# Altium PCB AnanasSTM32.PcbDoc
Units mm, origin at the board's own origin, x right, y up, seen from the top; angles counter-clockwise.
Board outline 41.4 x 42 mm, 2 copper layers (Top Layer, Bottom Layer); 57 components, 52 nets, 207 pads, 38 vias.
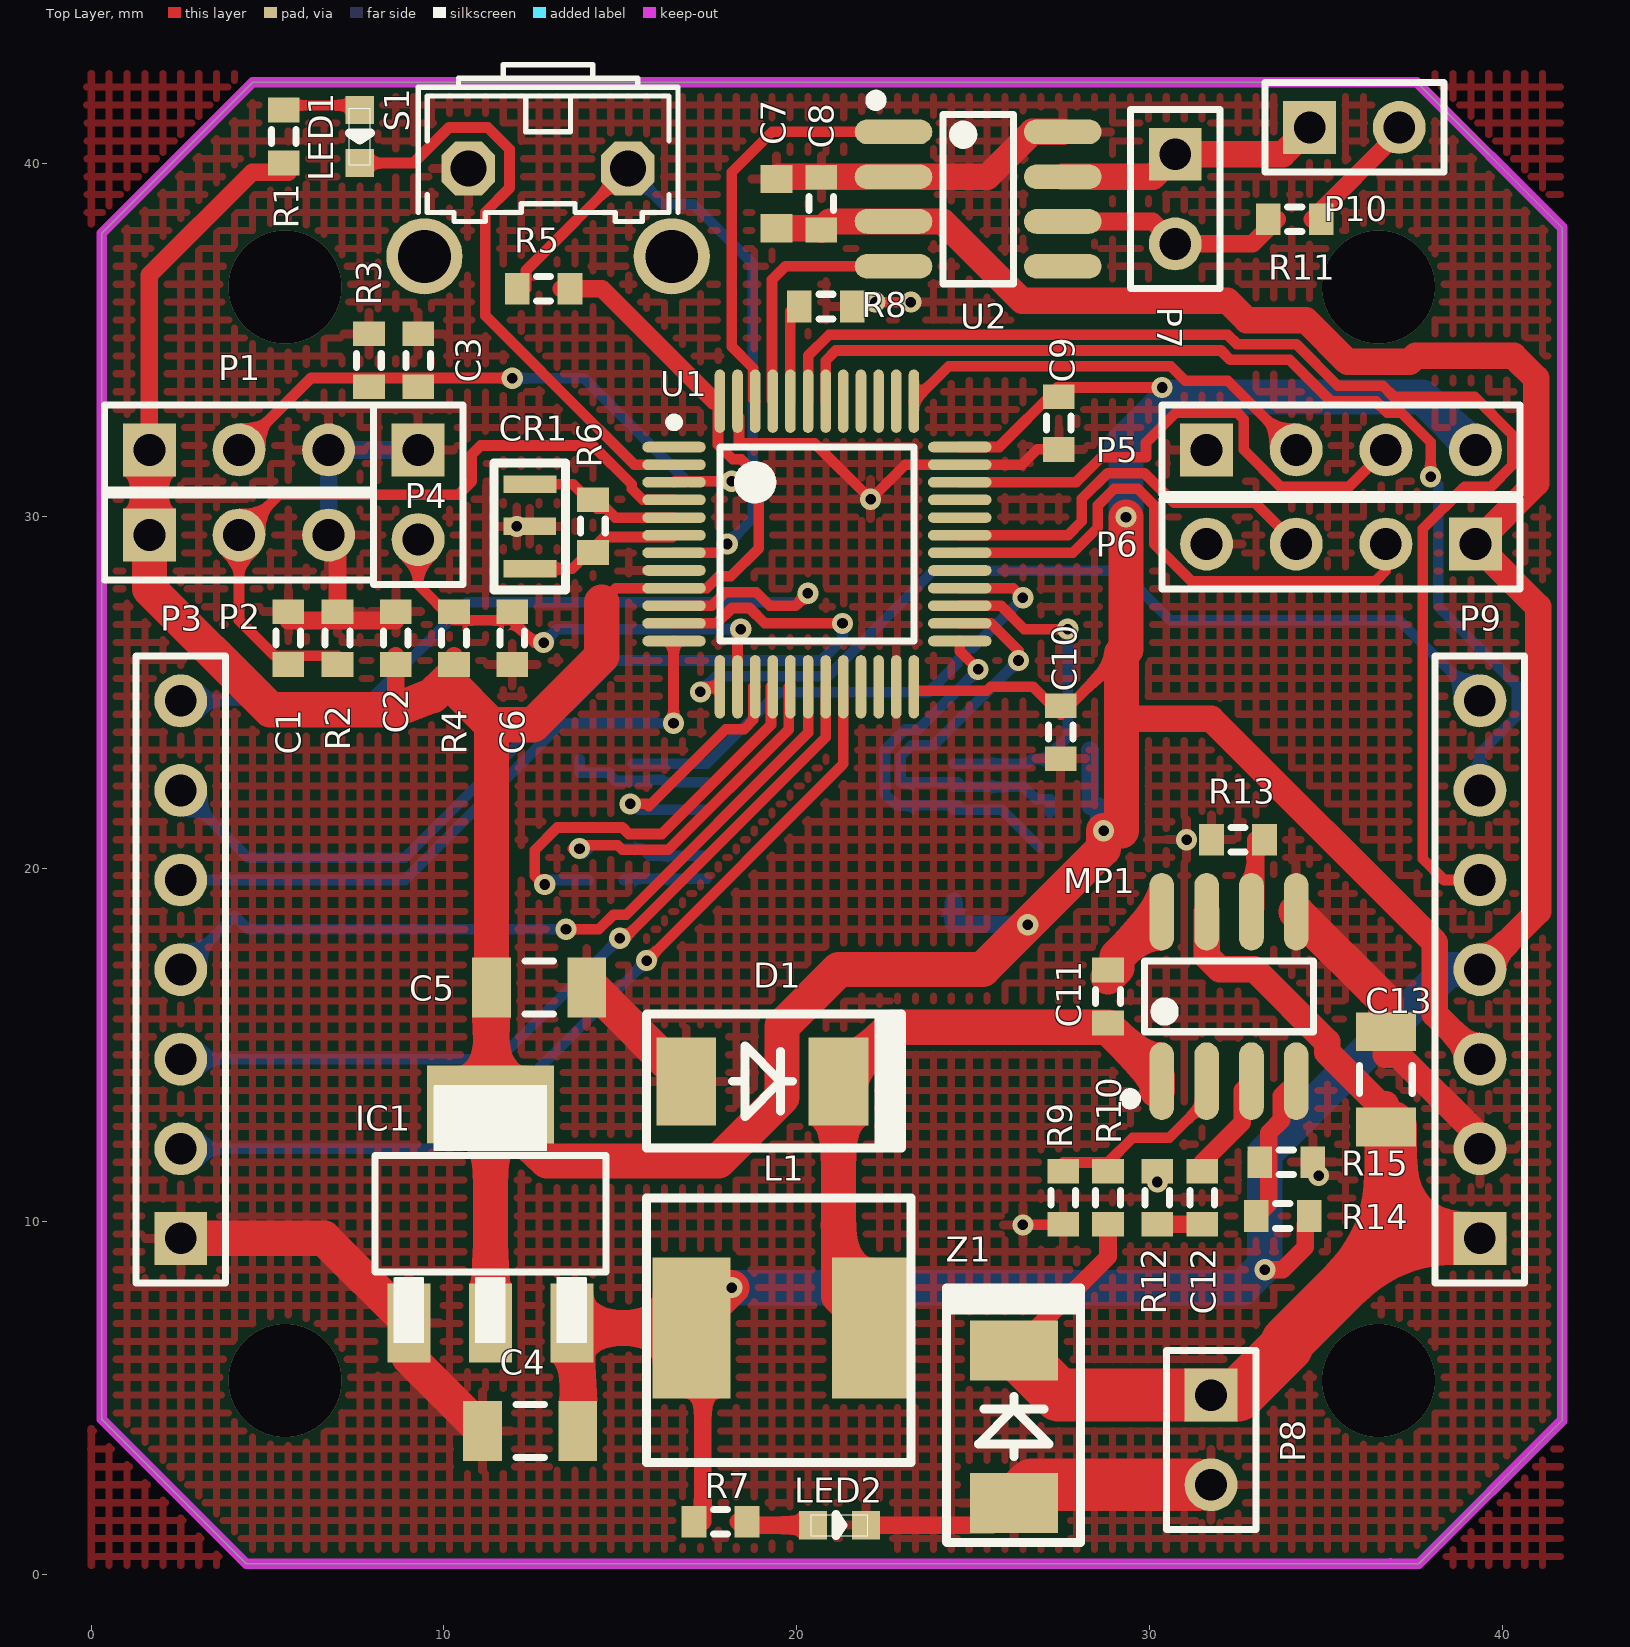
[diagram p0: Top Layer view]
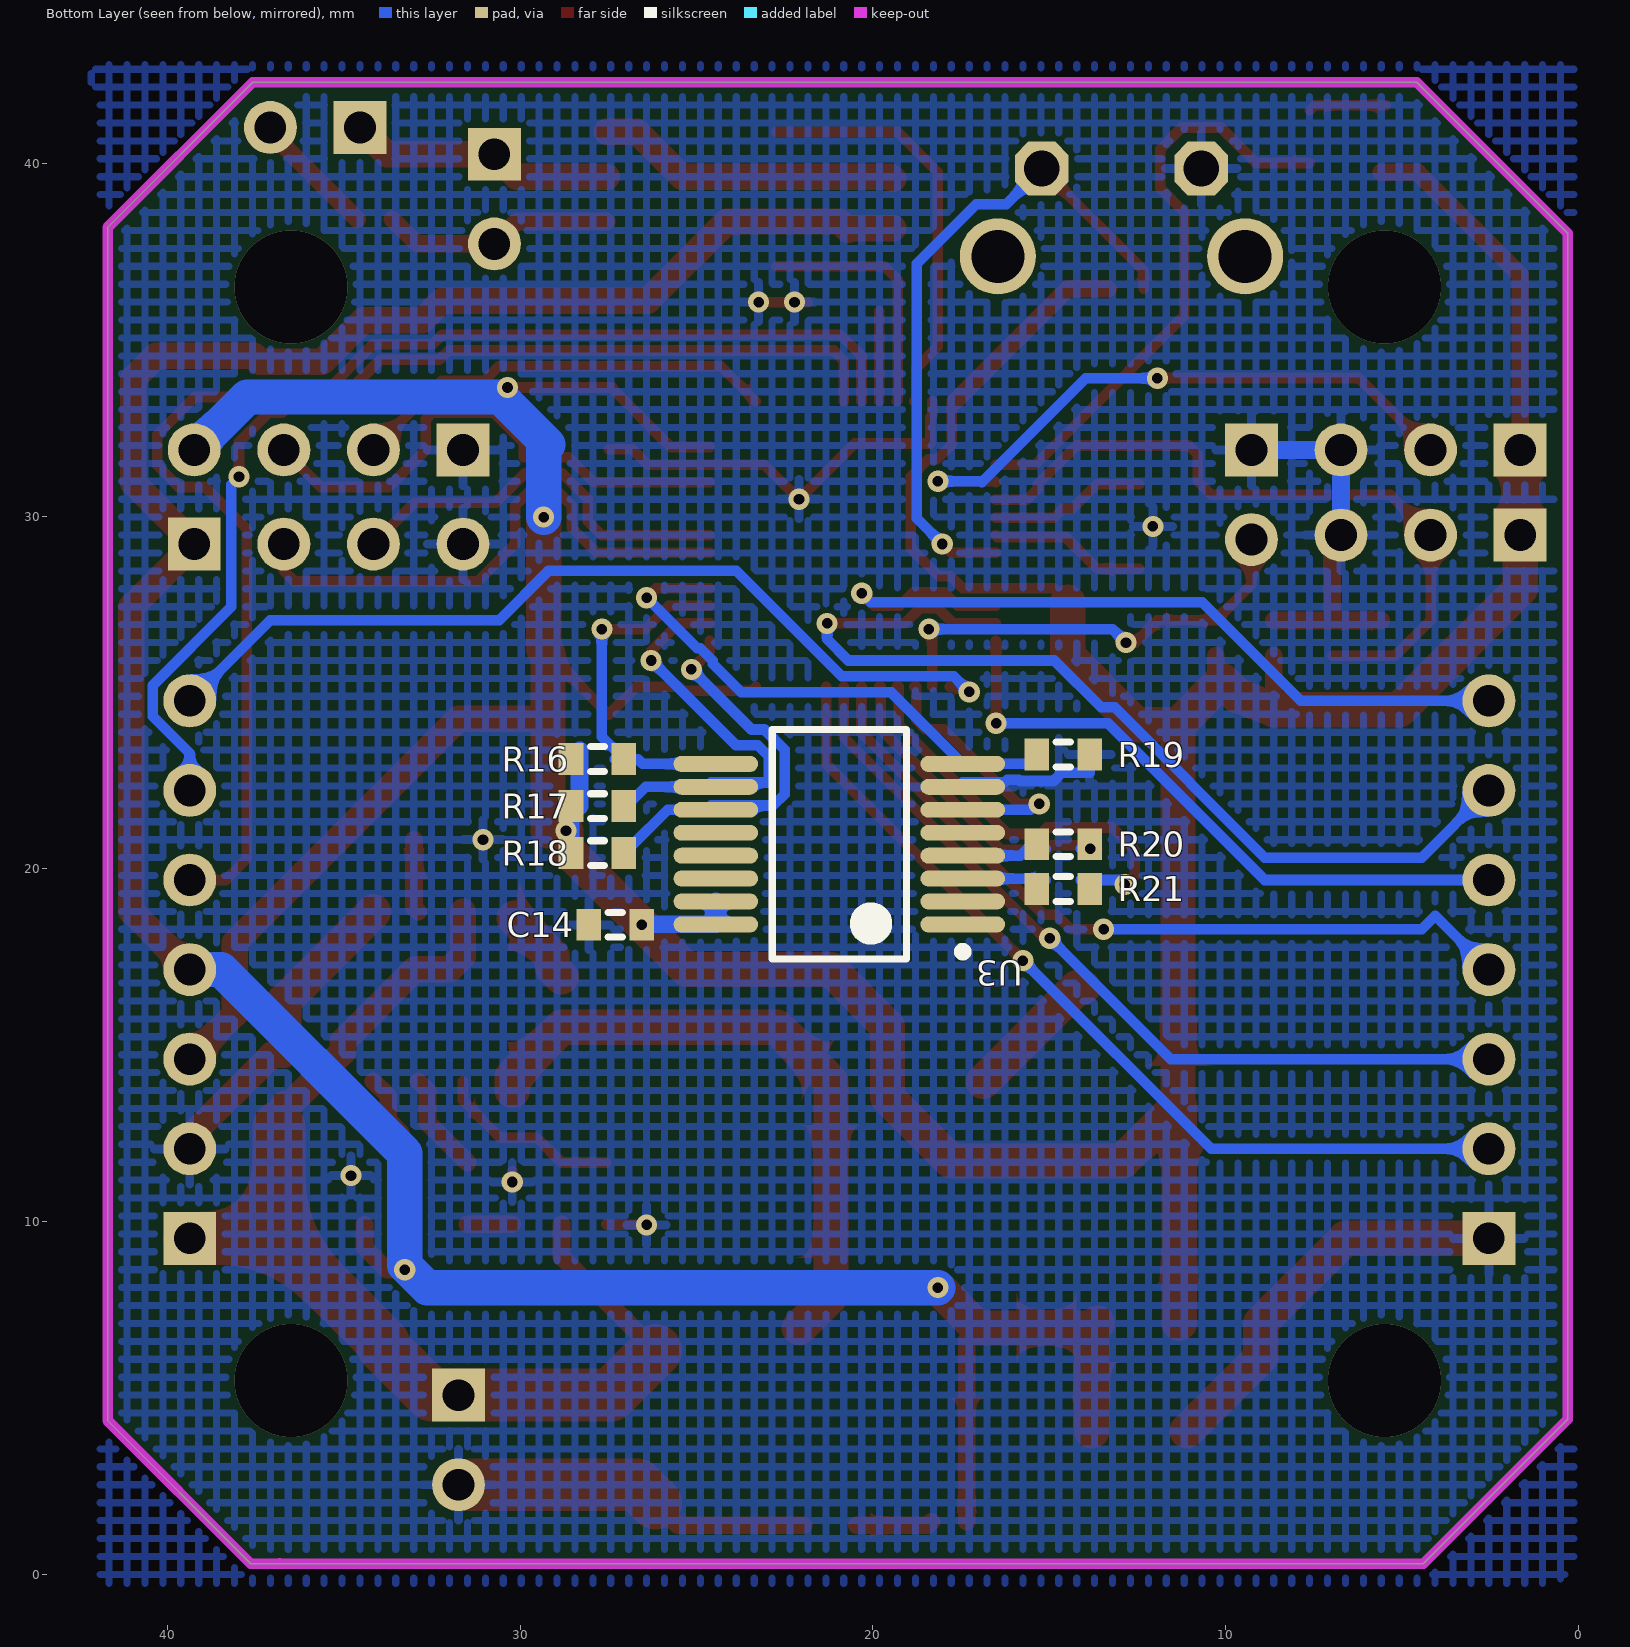
[diagram p1: Bottom Layer view, seen from below]

## Layer stack, top to bottom
Top Solder: solder mask 0.0102, Solder Resist, Dk 3.5
Top Layer: signal copper 0.0356
Dielectric 1: dielectric 0.32, FR-4, Dk 4.8
Bottom Layer: signal copper 0.0356
Bottom Solder: solder mask 0.0102, Solder Resist, Dk 3.5

## Board outline
4.399,0.3 0.3,4.399 0.3,38.019 4.581,42.3 37.583,42.3 41.7,38.183 41.7,4.362 37.638,0.3

## Design rules (kind name [scope] priority, off if disabled: settings)
Clearance [All] p1: gap=0.15
DiffPairsRouting [All] p1: maxlimit=0.254 minlimit=0.254 mostfreqgap=0.254 toplayer_minwidth=0.381 toplayer_maxwidth=1 toplayer_prefwidth=0.381 bottomlayer_minwidth=0.381 bottomlayer_maxwidth=1 bottomlayer_prefwidth=0.381 maxuncoupledlength=12.7
HoleSize [All] p1 off: absolutevalues=TRUE maxlimit=5 minlimit=0.025 maxpercent=80.000 minpercent=20.000
HoleToHoleClearance [All] p1 off: gap=0.254 allowstackedmicrovias=TRUE
MinimumSolderMaskSliver [All] p1: minsoldermaskwidth=0.1
PolygonConnect [All] p1: connectstyle=Relief reliefconductorwidth=0.254 reliefentries=4 polygonreliefangle="90 Angle" airgapwidth=0.254
RoutingVias [All] p1: holewidth=0.3 width=0.6 viastyle="Through Hole" minholewidth=0.3 minwidth=0.6 maxholewidth=0.711 maxwidth=1.27
SilkToBoardRegionClearance [All] p1 off:
SilkToSilkClearance [All] p1 off: silktosilkclearance=0
SilkToSolderMaskClearance [IsPad] p1 off: minsilkscreentomaskgap=0 clearancetoexposedcopper=TRUE
SolderMaskExpansion [All] p1 off: expansion=0.1
Width [All] p1: maxlimit=1.5 minlimit=0.2 preferedwidth=0.203 toplayer_minwidth=0.203 minimp=50.000000 maximp=50.000000 favimp=50.000000
23 further rules are at their usual default settings.

## Classes and differential pairs
differential pair CAN: +CAN_P -CAN_N

## Components (designator, comment, footprint, x,y, rotation, side; value= is the part's Value field where it differs from the comment)
C1 "100pF" J1-0603 5.588,26.543 r270 top (schematic designator C12)
C2 "100pF" J1-0603 8.636,26.543 r270 top (schematic designator C9)
C3 "100pF" J1-0603 9.271,34.417 r270 top (schematic designator C14)
C4 "22uF" C1206 12.446,4.064 r0 top (schematic designator C15)
C5 "22uf" C1206 12.7,16.637 r180 top (schematic designator C2)
C6 "10uF" J1-0603 11.938,26.543 r90 top (schematic designator C13)
C7 "10uF" 1608[0603] 19.431,38.862 r90 top (schematic designator C1)
C8 "100pF" J1-0603 20.701,38.862 r90 top (schematic designator C10)
C9 "4uF7" J1-0603 27.432,32.639 r90 top (schematic designator C7)
C10 "100pF" J1-0603 27.485,23.876 r90 top (schematic designator C8)
C11 "100pF" J1-0603 28.829,16.383 r270 top (schematic designator C4)
C12 "150pF" J1-0603 31.496,10.676 r90 top (schematic designator C6)
C13 "10uF" C1206 36.703,14.031 r270 top (schematic designator C3)
C14 "100pF" J1-0603 27.305,18.415 r180 bottom (schematic designator C11)
CR1 "8M" CSTCE8M 12.446,29.718 r270 top
D1 "SS22" SOD-6 16.878,13.97 r0 top (schematic designator D2)
IC1 "1117" SOT-223 9.017,7.112 r0 top
L1 "22uH" L74 19.431,6.985 r180 top
LED1 "LED-XH" LED-0603 7.62,40.005 r0 top (schematic designator LED2)
LED2 "LED-XH" LED-0603 21.971,1.397 r90 top (schematic designator LED1)
MP1 "MP1584" LC-SOIC-8_150mil 32.258,16.383 r0 top
P1 "STOP2" HDR1X3 1.651,31.877 r0 top (schematic designator P9)
P2 "STOP1" HDR1X3 1.651,29.464 r0 top (schematic designator P7)
P3 "EXTENSION1" HDR1X7 2.54,9.525 r90 top
P4 "TEMP" HDR1X2 9.271,31.877 r270 top (schematic designator P8)
P5 "Header 4" HDR1X4 31.623,31.877 r0 top (schematic designator P2)
P6 "UART" HDR1X4 39.243,29.21 r180 top (schematic designator P4)
P7 "CAN" HDR1X2 30.734,40.259 r270 top (schematic designator P5)
P8 "Header 2" HDR1X2 31.75,5.08 r270 top (schematic designator P1)
P9 "EXTENSION2" HDR1X7 39.37,9.525 r90 top (schematic designator P6)
P10 "CAN" HDR1X2 34.544,41.021 r0 top
R1 "4K7" J1-0603 5.461,40.763 r270 top (schematic designator R6)
R2 "10K" J1-0603 6.985,26.543 r270 top (schematic designator R21)
R3 "10K" J1-0603 7.874,34.417 r270 top (schematic designator R22)
R4 "4.7K" J1-0603 10.287,26.543 r270 top (schematic designator R19)
R5 "4K7" J1-0603 12.827,36.449 r0 top (schematic designator R23)
R6 "1M" J1-0603 14.224,29.718 r90 top (schematic designator R12)
R7 "4K7" J1-0603 17.841,1.494 r0 top (schematic designator R1)
R8 "4K7" J1-0603 20.828,35.941 r180 top (schematic designator R7)
R9 "24.9K" J1-0603 27.559,10.676 r270 top (schematic designator R11)
R10 "100K" J1-0603 28.829,10.676 r90 top (schematic designator R8)
R11 "120R" J1-0603 34.124,38.42 r180 top (schematic designator R16)
R12 "100K" J1-0603 30.226,10.676 r90 top (schematic designator R14)
R13 "200K" J1-0603 32.512,20.828 r180 top (schematic designator R9)
R14 "210K" J1-0603 33.782,10.16 r180 top (schematic designator R13)
R15 "40.2K" J1-0603 33.883,11.684 r0 top
R16 "4K7" J1-0603 27.813,23.114 r0 bottom (schematic designator R4)
R17 "4K7" J1-0603 27.813,21.78 r0 bottom (schematic designator R3)
R18 "4K7" J1-0603 27.813,20.447 r0 bottom (schematic designator R2)
R19 "0R" J1-0603 14.605,23.241 r0 bottom (schematic designator R20)
R20 "0R" J1-0603 14.605,20.701 r0 bottom (schematic designator R18)
R21 "0R" J1-0603 14.605,19.431 r0 bottom (schematic designator R17)
S1 "OMRON SWITCH" B3F-31XX 12.954,38.608 r180 top
U1 "STM32F103C8T6TR" STM-LQFP48_N 20.574,29.21 r0 top
U2 "TJA1050" LC-SOIC-8_150mil 25.146,38.989 r270 top
U3 "AS5145B" SSOP16_M 20.955,20.701 r0 bottom
Z1 "SMBJ33CA" D1210 26.162,2.032 r90 top

## Footprints (in the part's own frame and the unit in brackets; to place one, negate y for a bottom-side part, rotate by r counter-clockwise, add the part's x,y. Pads: shape width x height; smd on the part's side, far side on the other; paste and mask are expansions set on the pad)
1608[0603] [mm] "Chip Capacitor, Body 1.6x0.8mm, IPC High Density"
  rect 0.8x0.9 smd: 1(-0.7,0) 2(0.7,0)
  body extent -0.87,-0.48 0.87,0.48, height 1.3
B3F-31XX [mil]
  oct 60x60 hole 40: 1(-89,-49) 2(89,-49)
  round 85 hole 59: 3(-138,49) 4(138,49)
  silkscreen extent -145,-165 145,10
C1206 [mm] "Chip Capacitor, Body 3.2x1.6mm, IPC High Density"
  rect 1.1x1.7 smd: 1(-1.35,0) 2(1.35,0)
  silkscreen extent -0.4,-0.75 0.4,0.75, body extent -1.7,-0.9 1.7,0.9, height 1.3
CSTCE8M [mm]
  rect 0.5x1.5 smd: 1(-1.192,0) 2(0.008,-0.013) 3(1.208,0)
  silkscreen extent -1.79,-1.03 1.81,1
D1210 [mm]
  rect 1.7x2.5 smd: A(-0.005,-0.004) K(4.313,-0.004)
  silkscreen extent -1.13,-1.89 6.09,1.91
HDR1X2 [mm] "Connector; Header; 2 Position"
  rect 1.5x1.5 hole 0.9: 1(0,0)
  round 1.5 hole 0.9: 2(2.54,0)
  silkscreen extent -1.27,-1.27 3.81,1.27
HDR1X3 [mm] "Connector; Header; 3 Position"
  rect 1.5x1.5 hole 0.9: 1(0,0)
  round 1.5 hole 0.9: 2(2.54,0) 3(5.08,0)
  silkscreen extent -1.27,-1.27 6.35,1.27
HDR1X4 [mm] "Connector; Header; 4 Position"
  rect 1.5x1.5 hole 0.9: 1(0,0)
  round 1.5 hole 0.9: 2(2.54,0) 3(5.08,0) 4(7.62,0)
  silkscreen extent -1.27,-1.27 8.89,1.27
HDR1X7 [mm] "Connector; Header; 7 Position"
  rect 1.5x1.5 hole 0.9: 1(0,0)
  round 1.5 hole 0.9: 2(2.54,0) 3(5.08,0) 4(7.62,0) 5(10.16,0) 6(12.7,0) 7(15.24,0)
  silkscreen extent -1.27,-1.27 16.51,1.27
J1-0603 [mm] "Chip Resistor, Body 1.6x0.8mm, IPC High Density"
  rect 0.7x0.9 smd: 1(-0.75,0) 2(0.75,0)
  silkscreen extent -0.2,-0.35 0.2,0.35, body extent -0.85,-0.48 0.85,0.48, height 0.9
L74 [mm]
  rect 2.2x4 smd: 1(-2.667,0) 2(2.413,0)
  silkscreen extent -3.81,-3.68 3.68,3.81
LC-SOIC-8_150mil [mm]
  oval 0.7x2.2 smd: 1(-1.905,-2.4) 2(-0.635,-2.4) 3(0.635,-2.4) 4(1.905,-2.4) 5(1.905,2.4) 6(0.635,2.4) 7(-0.635,2.4) 8(-1.905,2.4)
  silkscreen extent -2.95,-3.05 2.4,1
LED-0603 [mm]
  rect 0.8x0.8 smd: A(-0.004,1.506) K(-0.004,0.007)
  silkscreen extent -0.3,-0.04 0.3,1.56
SOD-6 [mm]
  rect 1.7x2.5 smd: A(-0.007,0.004) K(4.311,0.004)
  silkscreen extent -1.13,-1.88 6.09,1.92
SOT-223 [mil]
  rect 48x88 smd: 1(-0.33,0.37) 2(90.67,0.37) 3(181.67,0.37)
  rect 141.73x86.61 smd: 2(90.67,244.38)
  silkscreen extent -39,-22 221,266
SSOP16_M [mm] "SOP, 16-Leads, Body 6.2x5.3mm, Pitch 0.65mm, IPC Low Density"
  oval 2.4x0.45 smd: 1(-3.5,2.275) 2(-3.5,1.625) 3(-3.5,0.975) 4(-3.5,0.325) 5(-3.5,-0.325) 6(-3.5,-0.975) 7(-3.5,-1.625) 8(-3.5,-2.275) 9(3.5,-2.275) 10(3.5,-1.625) 11(3.5,-0.975) 12(3.5,-0.325) 13(3.5,0.325) 14(3.5,0.975) 15(3.5,1.625) 16(3.5,2.275)
  silkscreen extent -3.62,-3.25 1.9,3.25, body extent -2.7,-3.25 2.7,3.25, height 2
STM-LQFP48_N [mm] "QFP, 48-Leads, Body 7x7mm, Pitch 0.5mm, IPC Medium Density"
  oval 1.8x0.3 smd: 1(-4.05,2.75) 2(-4.05,2.25) 3(-4.05,1.75) 4(-4.05,1.25) 5(-4.05,0.75) 6(-4.05,0.25) 7(-4.05,-0.25) 8(-4.05,-0.75) 9(-4.05,-1.25) 10(-4.05,-1.75) 11(-4.05,-2.25) 12(-4.05,-2.75) 25(4.05,-2.75) 26(4.05,-2.25) 27(4.05,-1.75) 28(4.05,-1.25) 29(4.05,-0.75) 30(4.05,-0.25) 31(4.05,0.25) 32(4.05,0.75) 33(4.05,1.25) 34(4.05,1.75) 35(4.05,2.25) 36(4.05,2.75)
  oval 0.3x1.8 smd: 13(-2.75,-4.05) 14(-2.25,-4.05) 15(-1.75,-4.05) 16(-1.25,-4.05) 17(-0.75,-4.05) 18(-0.25,-4.05) 19(0.25,-4.05) 20(0.75,-4.05) 21(1.25,-4.05) 22(1.75,-4.05) 23(2.25,-4.05) 24(2.75,-4.05) 37(2.75,4.05) 38(2.25,4.05) 39(1.75,4.05) 40(1.25,4.05) 41(0.75,4.05) 42(0.25,4.05) 43(-0.25,4.05) 44(-0.75,4.05) 45(-1.25,4.05) 46(-1.75,4.05) 47(-2.25,4.05) 48(-2.75,4.05)
  silkscreen extent -4.17,-2.75 2.75,3.57, body extent -3.5,-3.5 3.5,3.5, height 1.6

## Part data
C1 C2 C3 C4 C5 C6 C7 C8 C9 C10 C11 C12 C13 C14: library part "Cap Semi", "Capacitor (Semiconductor SIM Model)"
CR1: library part CSTCE8M, "陶振"
D1: library part 1N4001, "二极管"
IC1: "三端稳压器"
L1: library part L, "电流互感器"
LED1 LED2: "发光二极管"
P1 P2: library part "Header 3", "Header, 3-Pin"
P3 P9: library part "Header 7", "Header, 7-Pin"
P4 P7 P10: library part "Header 2", "Header, 2-Pin"
P5: "Header, 4-Pin"
P6: library part "Header 4", "Header, 4-Pin"
P8: "Header, 2-Pin"
R1 R2 R3 R4 R5 R6 R7 R8 R9 R10 R11 R12 R13 R14 R15 R16 R17 R18 R19 R20 R21: library part Res3, "Resistor"
S1: library part 31-XX
U1: "ARM Cortex-M3 32-bit MCU, 64 KB Flash, 20 KB Internal RAM, 37 I/Os, 48-pin LQFP, -40 to 85 degC, Tape and Reel"
Z1: library part 1N4733A, "稳压管"

## Via types
v1: diameter 0.6, hole 0.3, Top Layer to Bottom Layer, 34 vias
v2: diameter 3.2, hole 3.2, Top Layer to Bottom Layer, 4 vias

## Nets (pads, with @x,y where several pads share a name; then routed paths per layer and width w, separated by ;. In a path a pad name is that pad's centre, name@x,y a point inside that pad or via, vN(x,y) a via of type N, cw(c..) or ccw(c..) an arc to the next point about the centre after c; other vN are vias at no path point)
3V3: C2.2 C5.2 C9.2 C10.2 C14.2 IC1.2 P1.1 P2.1 P5.4 P9.3 R1.2 R4.2 R5.2 R16.2 R17.2 R18.2 U1.9 U1.24 U1.36 U1.48 U3.15 U3.16 | length 146.6
  Top Layer w0.3: 14.478,27.559 14.879,27.96 U1.9 17.457,27.96 17.794,28.297 18.137,28.297 18.923,29.083 18.923,31.115 18.428,31.61 18.188,31.61 17.77,32.028 U1.48@17.77,33.26 ; U1.24 23.43,25.054 25.395,25.054 25.501,25.16 26.701,25.16 27.485,24.376 29.21,26.101 ; U1.36 25.738,31.96 27.385,33.607 27.385,33.647 v1(30.361,33.647)
  Top Layer w0.5: P1.1 1.651,36.838 4.564,39.751 R1.2@5.588,39.751 ; 8.636,24.511 C2.2@8.636,26.043 ; 10.16,25.273 10.287,25.4 R4.2@10.287,26.043 ; R5.2@13.327,36.449 14.481,36.449 17.67,33.26
  Top Layer w0.75: 29.21,24.257 31.75,24.257 38.095,17.912 38.095,15.88 P9.3
  Top Layer w1: P1.1 P2.1 1.651,27.94 5.08,24.511 8.636,24.511 9.669,24.909 10.096,25.336 11.35,24.083 ; IC1.2@11.32,7.121 IC1.2@11.32,13.319 ; 14.478,27.559 14.478,26.035 12.526,24.083 11.35,24.083 ; v1(28.702,21.082) 28.702,20.574 25.273,17.145 21.193,17.145 19.585,15.537 19.585,13.522 17.782,11.719 12.92,11.719 IC1.2@11.32,13.319 ; 29.21,21.082 29.21,24.257 29.21,26.101 29.337,26.228 v1(29.337,29.972) ; IC1.2@11.32,13.319 11.35,13.349 C5.2 11.35,24.083
  Bottom Layer w0.5: U3.15 U3.16 C14.2@26.54,18.426 ; R16.2@28.313,23.114 28.313,23.36 28.321,23.352 R17.2@28.321,21.78 ; R18.2 R17.2
  Bottom Layer w1: v1(29.337,29.972) 29.337,31.903 29.21,32.03 30.561,33.381 37.739,33.381 P5.4
  other v1: 26.551,18.415
5V: C4.2 C7.1 C8.1 IC1.3 L1.2 P6.1 P9.4 R7.1 R14.1 U2.3 | length 85
  Top Layer w0.5: L1.2 17.341,6.662 R7.1@17.341,1.494 ; v1(33.274,8.636) 33.782,8.636 34.417,9.271 R14.1@34.417,9.906
  Top Layer w0.75: C7.1 20.651,38.162 C8.1 20.943,38.354 U2.3 24.141,38.354 26.39,36.105 32.213,36.105 32.764,35.554 34.441,35.554 35.62,34.375 37.38,34.375 37.549,34.544 40.328,34.544 40.968,33.904 40.968,30.935 P6.1 41.025,27.428 41.025,18.8 P9.4
  Top Layer w1: IC1.3 IC1.3@13.796,6.957 ; C4.2 IC1.3@13.796,6.957 ; v1(18.161,8.128) L1.2 13.824,6.985 IC1.3@13.796,6.957 ; P9.4 P9.4@39.526,17.145
  Bottom Layer w1: v1(18.161,8.128) 32.639,8.128 v1@33.21,8.7 ; v1@33.274,8.763 33.274,11.938 38.481,17.145 P9.4
12V: C13.2 MP1.7 P8.1 P9.1 R10.1 Z1.K | length 31.7
  Top Layer w0.5: Z1.K 28.829,9.008 R10.1
  Top Layer w0.75: MP1.7 31.623,17.526 31.991,17.158 32.975,17.158 35.038,15.095 35.038,14.804 36.511,13.331 36.703,13.331
  Top Layer w1.5: Z1.K 27.431,5.08 32.512,5.08 33.896,6.464 33.896,6.579 36.842,9.525 ; C13.2@36.842,12.688 36.842,9.525 ; P9.1 36.842,9.525
5145CLK: R17.1 U1.26 U3.10 | length 12.5
  Top Layer w0.3: U1.26 25.51,26.96 26.289,26.181 v1(26.289,25.908)
  Bottom Layer w0.3: v1(26.289,25.908) 23.882,23.501 23.263,23.501 22.955,23.193 22.955,22.451 24.58,22.451 U3.10 26.442,22.326 26.797,21.971 27.186,21.971 27.178,21.963 R17.1@27.178,21.59
5145CS: R18.1 U1.25 U3.11 | length 11.1
  Top Layer w0.3: U1.25 24.624,26.176 v1(25.146,25.654)
  Bottom Layer w0.3: v1(25.146,25.654) 23.443,23.951 23.076,23.951 22.505,23.38 22.505,22.121 22.825,21.801 24.58,21.801 U3.11 25.822,21.676 R18.1@26.865,20.633
5145DOUT: R16.1 U1.27 U3.9 | length 10.2
  Top Layer w0.3: U1.27 25.793,27.46 26.456,26.797 v1(27.686,26.797)
  Bottom Layer w0.3: U3.9 26.532,22.976 26.67,23.114 R16.1@27.051,23.114 ; R16.1@27.313,23.114 R16.1@27.051,23.114 ; v1(27.686,26.797) 27.686,23.749 R16.1@27.051,23.114
BOOT0: R8.2 U1.44 | length 2.6
  Top Layer w0.3: U1.44 R8.2@19.824,35.814
CAN_N: P7.1 P10.1 U2.7 | length 7.6
  Top Layer w0.75: U2.7 30.099,39.624 P7.1 33.782,40.259 P10.1
CAN_P: P7.2 R11.2 U2.6 | length 6.6
  Top Layer w0.5: U2.6 30.099,38.354 P7.2 32.923,37.719 R11.2@33.624,38.42
CAN_RX: U1.45 U2.4 | length 7.1
  Top Layer w0.3: U1.45 19.301,33.283 19.301,36.7 19.685,37.084 U2.4
CAN_TX: U1.46 U2.1 | length 11.8
  Top Layer w0.3: U1.46 18.774,33.31 18.774,34.196 18.161,34.809 18.161,39.751 19.304,40.894 U2.1
DIR_OUT: P3.4 U1.18 | length 22.2
  Top Layer w0.3: v1(13.462,18.288) 14.391,18.288 14.808,18.705 15.164,18.705 20.324,23.864 U1.18
  Bottom Layer w0.3: P3.4 4.064,18.669 4.445,18.288 v1(13.462,18.288)
ENABLE_OUT: P3.2 U1.20 | length 25.5
  Top Layer w0.3: v1(15.748,17.399) 21.324,22.975 U1.20
  Bottom Layer w0.3: P3.2 10.414,12.065 v1(15.748,17.399)
ENCODER_A: R21.1 U1.16 | length 11.9
  Top Layer w0.3: v1(12.859,19.558) 12.827,19.558 12.573,19.812 12.573,20.534 13.213,21.174 15.061,21.174 15.245,20.99 16.177,20.99 19.274,24.087 19.274,25.16 U1.16
  Bottom Layer w0.3: v1(12.859,19.558) 12.986,19.685 R21.1@14.105,19.685
ENCODER_B: R20.1 U1.17 | length 9.5
  Top Layer w0.3: v1(13.843,20.574) 13.648,20.574 13.741,20.667 14.932,20.667 15.059,20.54 16.363,20.54 19.774,23.951 19.774,25.16 U1.17
  Bottom Layer w0.3: v1(13.843,20.574) 13.851,20.574 13.978,20.447 R20.1@14.105,20.574
GND: C1.1 C2.1 C3.1 C4.1 C5.1 C6.1 C7.2 C8.2 C9.1 C10.1 C13.1 C14.1 CR1.2 D1.A IC1.1 LED2.K MP1.5 P1.3 P2.3 P3.1 P4.1 P5.1 P6.4 P8.2 P9.2 R2.1 R3.1 R8.1 R9.2 R12.2 R13.2 R15.2 R19.1 S1.2 U1.8 U1.23 U1.35 U1.47 U2.2 U2.8 U3.7 Z1.A | length 71.5
  Top Layer w0.3: U1.47 18.324,32.857 18.374,32.807 18.374,32.06 20.518,32.06 v1(22.098,30.48) 23.078,31.46 U1.35 26.38,31.46 26.817,31.897 C9.1@27.485,31.897 ; R8.1@21.844,36.068 v1(22.225,36.068) v1(23.241,36.068) ; v1(26.416,9.906) 27.539,9.906 R9.2 ; v1(30.226,11.124) R12.2
  Top Layer w0.5: C1.1@5.588,27.043 R2.1@6.985,27.043 ; P2.3 6.985,29.21 R2.1@6.985,27.043 ; C2.1@8.636,27.043 R2.1@6.985,27.043 ; LED2.K 25.532,1.393 Z1.A
  Top Layer w0.75: C7.2 19.493,39.624 U2.2 25.411,39.624 26.681,40.894 U2.8 ; 36.703,14.731 37.042,14.731 39.37,12.404 P9.2
  Top Layer w1: P3.1 6.605,9.525 IC1.1 9.009,6.151 C4.1 ; C5.1 14.208,16.637 D1.A ; MP1.5 36.703,16.243 C13.1
  Top Layer w1.5: Z1.A 26.679,2.54 P8.2@31.369,2.54
  Bottom Layer w0.3: R19.1@13.855,23.114 13.855,22.721 14.705,22.721 14.705,22.667 14.881,22.491 15.829,22.491 15.864,22.526 16.188,22.526 16.263,22.451 17.455,22.451 U3.7
  Bottom Layer w0.5: P2.3 P1.3 P4.1
  other v1: 34.798,11.303 31.056,20.828 12.065,29.71
LED: LED1.K U1.2 | length 17
  Top Layer w0.3: LED1.K 9.138,40.012 10.145,41.019 11.242,41.019 11.859,40.401 11.859,39.304 11.176,38.621 11.176,35.687 14.409,32.454 14.41,32.454 15.404,31.46 U1.2
MODE_INDEX: U1.15 U3.6 | length 7.8
  Top Layer w0.3: v1(15.285,21.844) 15.748,21.844 15.811,21.78 17.991,23.96 18.51,23.96 18.774,24.224 18.774,25.16 U1.15
  Bottom Layer w0.3: v1(15.285,21.844) 15.367,21.844 15.535,21.676 U3.6
NetC11_1: C11.1 MP1.8 | length 2.3
  Top Layer w0.5: C11.1@28.829,16.883 C11.1@28.829,16.937
  Top Layer w1: C11.1@28.829,16.937 29.083,17.191 29.083,17.513 MP1.8@30.169,18.599
NetC11_2: C11.2 D1.K L1.1 MP1.1 | length 18
  Top Layer w1: L1.1 21.189,7.894 D1.K 22.722,15.507 28.829,15.507 30.226,14.11 MP1.1@30.226,13.716
NetC12_1: C12.1 R12.1 | length 1.3
  Top Layer w0.5: R12.1 C12.1
NetC12_2: C12.2 MP1.3 | length 2.9
  Top Layer w0.5: C12.2@31.496,11.676 32.629,12.809 32.629,13.719 MP1.3
NetCR1_1: CR1.1 R6.2 U1.5 | length 4.5
  Top Layer w0.3: CR1.1 13.659,30.91 14.351,30.218 14.605,30.218 14.863,29.96 U1.5
NetCR1_3: CR1.3 R6.1 U1.6 | length 4.5
  Top Layer w0.3: CR1.3 13.643,28.51 14.543,29.41 16.474,29.41 U1.6
NetLED1_A: LED1.A R1.1 | length 2.2
  Top Layer w0.3: R1.1@5.461,41.648 7.479,41.648 LED1.A
NetLED2_A: LED2.A R7.2 | length 2.2
  Top Layer w0.5: R7.2@18.341,1.494 18.443,1.393 LED2.A
NetMP1_2: MP1.2 R9.1 R10.2 | length 5.3
  Top Layer w0.3: R9.1@27.559,11.676 28.829,11.676 29.533,12.38 30.566,12.38 31.623,13.437 MP1.2
NetMP1_4: MP1.4 R14.2 R15.1 | length 4.3
  Top Layer w0.5: R14.2 33.383,10.511 33.383,11.684 33.383,12.515 33.747,12.879 33.747,13.567 MP1.4
NetMP1_6: MP1.6 R13.1 | length 2.1
  Top Layer w0.5: MP1.6 33.012,18.902 R13.1@33.012,20.828
NetP10_2: P10.2 R11.1 | length 3.6
  Top Layer w0.5: R11.1@34.624,38.42 37.084,40.88 P10.2
NetR20_2: R20.2 U3.4 | length 2.4
  Bottom Layer w0.3: R20.2@15.105,20.574 15.621,20.574 15.819,20.376 U3.4
NetR21_2: R21.2 U3.3 | length 2.4
  Bottom Layer w0.3: R21.2@15.105,19.685 15.146,19.726 U3.3
PDIO: R19.2 U1.28 U3.8 | length 15
  Top Layer w0.3: U1.28 26.142,27.96 v1(26.416,27.686)
  Bottom Layer w0.3: R19.2@15.355,22.976 U3.8 19.487,25.008 23.738,25.008 24.546,25.816 24.546,25.903 24.897,26.254 24.984,26.254 v1(26.416,27.686)
PWM1: P3.7 U1.10 | length 23.3
  Top Layer w0.3: U1.10 17.593,27.46 17.98,27.847 18.85,27.847 19.237,27.46 19.967,27.46 v1(20.32,27.813)
  Bottom Layer w0.3: P3.7 7.874,24.765 10.668,27.559 20.066,27.559 v1(20.32,27.813)
PWM2: P3.6 U1.11 | length 27.7
  Top Layer w0.3: U1.11 17.729,26.96 18.166,27.397 18.664,27.397 19.101,26.96 v1(21.3,26.96)
  Bottom Layer w0.3: P3.6 4.445,20.32 8.889,20.32 13.149,24.58 13.531,24.58 14.859,25.908 20.701,25.908 21.3,26.507 v1(21.3,26.96)
PWM3: P3.5 U1.12 | length 18.1
  Top Layer w0.3: v1(16.51,24.13) 16.51,26.446 U1.12
  Bottom Layer w0.3: P3.5 8.89,19.685 13.335,24.13 v1(16.51,24.13)
PWM4: P9.7 U1.13 | length 25.7
  Top Layer w0.3: v1(17.272,25.019) 17.413,25.16 U1.13
  Bottom Layer w0.3: v1(17.272,25.019) 17.711,25.458 20.887,25.458 23.877,28.448 29.198,28.448 30.595,27.051 37.084,27.051 P9.7
RST: R5.1 S1.1 U1.7 | length 19.1
  Top Layer w0.3: R5.1@12.327,36.449 12.327,36.965 S1.1 ; U1.7 17.784,28.96 v1(18.034,29.21)
  Bottom Layer w0.3: S1.1 16.22,38.847 17.074,38.847 18.761,37.16 18.761,29.937 v1(18.034,29.21)
SCL: P9.6 U1.42 | length 30.8
  Top Layer w0.3: U1.42 20.824,34.41 21.111,34.697 32.03,34.697 32.298,34.429 33.975,34.429 35.154,33.25 36.427,33.25 36.75,32.927 37.138,32.927 37.973,32.092 v1(37.973,31.115)
  Bottom Layer w0.3: v1(37.973,31.115) 38.193,30.895 38.193,27.427 40.42,25.2 40.42,24.33 39.37,23.28 P9.6
SDA: P9.5 U1.43 | length 38.1
  Top Layer w0.3: U1.43 20.324,34.546 20.925,35.147 32.217,35.147 32.485,34.879 34.161,34.879 35.34,33.7 36.613,33.7 36.936,33.377 39.228,33.377 40.293,32.312 40.293,31.442 39.678,30.827 38.936,30.827 37.753,29.644 37.753,20.286 38.354,19.685 P9.5
STEP_OUT: P3.3 U1.19 | length 23.5
  Top Layer w0.3: v1(14.986,18.034) 15.13,18.034 20.824,23.728 U1.19
  Bottom Layer w0.3: P3.3 11.557,14.605 v1(14.986,18.034)
STOP1: C1.2 P2.2 R2.2 U1.4 | length 20.2
  Top Layer w0.3: R2.2@6.985,26.043 5.199,26.043 4.191,27.051 P2.2 5.334,30.607 10.414,30.607 10.795,30.988 10.795,31.75 11.049,32.004 14.224,32.004 15.324,30.904 15.324,30.774 15.638,30.46 U1.4
STOP2: C3.2 P1.2 R3.2 U1.3 | length 17.7
  Top Layer w0.3: P1.2 6.231,33.917 7.747,33.917 9.017,33.917 v1@11.93,33.917 ; U1.3 16.552,30.988 v1(18.161,30.988)
  Bottom Layer w0.3: v1(11.938,33.909) 13.97,33.909 16.919,30.96 16.947,30.988 v1(18.161,30.988)
SWCLK: P5.2 U1.37 | length 12.2
  Top Layer w0.3: U1.37 24.311,34.247 30.61,34.247 31.017,33.84 32.221,33.84 34.163,31.898 P5.2
SWDIO: P5.3 U1.34 | length 14.9
  Top Layer w0.3: U1.34 27.921,30.96 28.633,31.672 29.904,31.672 29.904,32.082 30.749,32.927 32.497,32.927 32.673,32.751 32.673,31.882 33.728,30.827 35.653,30.827 P5.3
SYSC: U1.29
TEMP1: C6.2 P4.2 R4.1 U1.14 | length 12.9
  Top Layer w0.3: P4.2 9.271,28.059 10.287,27.043 11.938,27.043 12.565,26.416 v1(12.827,26.416) ; U1.14 18.324,26.706 v1(18.415,26.797)
  Bottom Layer w0.3: v1(12.827,26.416) 13.208,26.797 v1(18.415,26.797)
UART_RX: P6.3 U1.31 | length 11.5
  Top Layer w0.3: U1.31 27.694,29.46 28.087,29.853 28.087,30.49 28.819,31.222 29.855,31.222 30.7,30.377 32.996,30.377 P6.3
UART_TX: P6.2 U1.30 | length 15.8
  Top Layer w0.3: U1.30 27.83,28.96 28.537,29.667 28.537,30.303 29.006,30.772 29.668,30.772 30.137,30.303 30.137,29.211 31.188,28.16 36.415,28.16 36.703,28.448 P6.2
USB_DM: U1.32
USB_DP: U1.33
USBBOOT: U1.38
pads on no net: S1.3 S1.4 U1.1 U1.21 U1.22 U1.39 U1.40 U1.41 U2.5 U3.1 U3.2 U3.5 U3.12 U3.13 U3.14
copper on no net:
  other v2: 5.5,5.5 36.5,5.5 5.5,36.5 36.5,36.5

## Polygon pours and split planes (outlines as drawn)
GND on Top Layer "GND_L01_P016" (hatched 90Degree grid 0.508 track 0.203, pour order 16): -0.127,42.545 41.656,42.545 41.656,0.127 42.037,-0.254 41.529,0.254 0,0.254
GND on Bottom Layer "GND_L02_P018" (hatched 90Degree grid 0.508 track 0.203, pour order 18): 0.127,42.799 41.91,42.799 42.291,42.418 41.91,42.037 41.91,-0.254 0.635,-0.254 0.127,0.254

## Keep-outs
Keep-Out Layer:
  lines w0.254: 36.83,0.3 36.83,0.337 ; 36.83,42.3 36.865,42.3
  lines w0.3: 0.3,4.399 0.3,38.019 4.581,42.3 37.583,42.3 41.7,38.183 41.7,4.362 37.638,0.3 4.399,0.3 0.3,4.399

## Dimensions
0.3,0.3 to 0.3,42.3 on Mechanical 1
0.3,0.3 to 41.7,0.3 on Mechanical 1